# Altium PCB GateDrive.PcbDoc (part 3 of 4)
Units mm, origin at the board's own origin, x right, y up, seen from the top; angles counter-clockwise.
Board outline 204.3 x 129.8 mm, 4 copper layers (Top Layer, Internal Plane 1, Internal Plane 2, Bottom Layer), stack 0.778 mm thick; 412 components, 227 nets, 1153 pads, 570 vias.
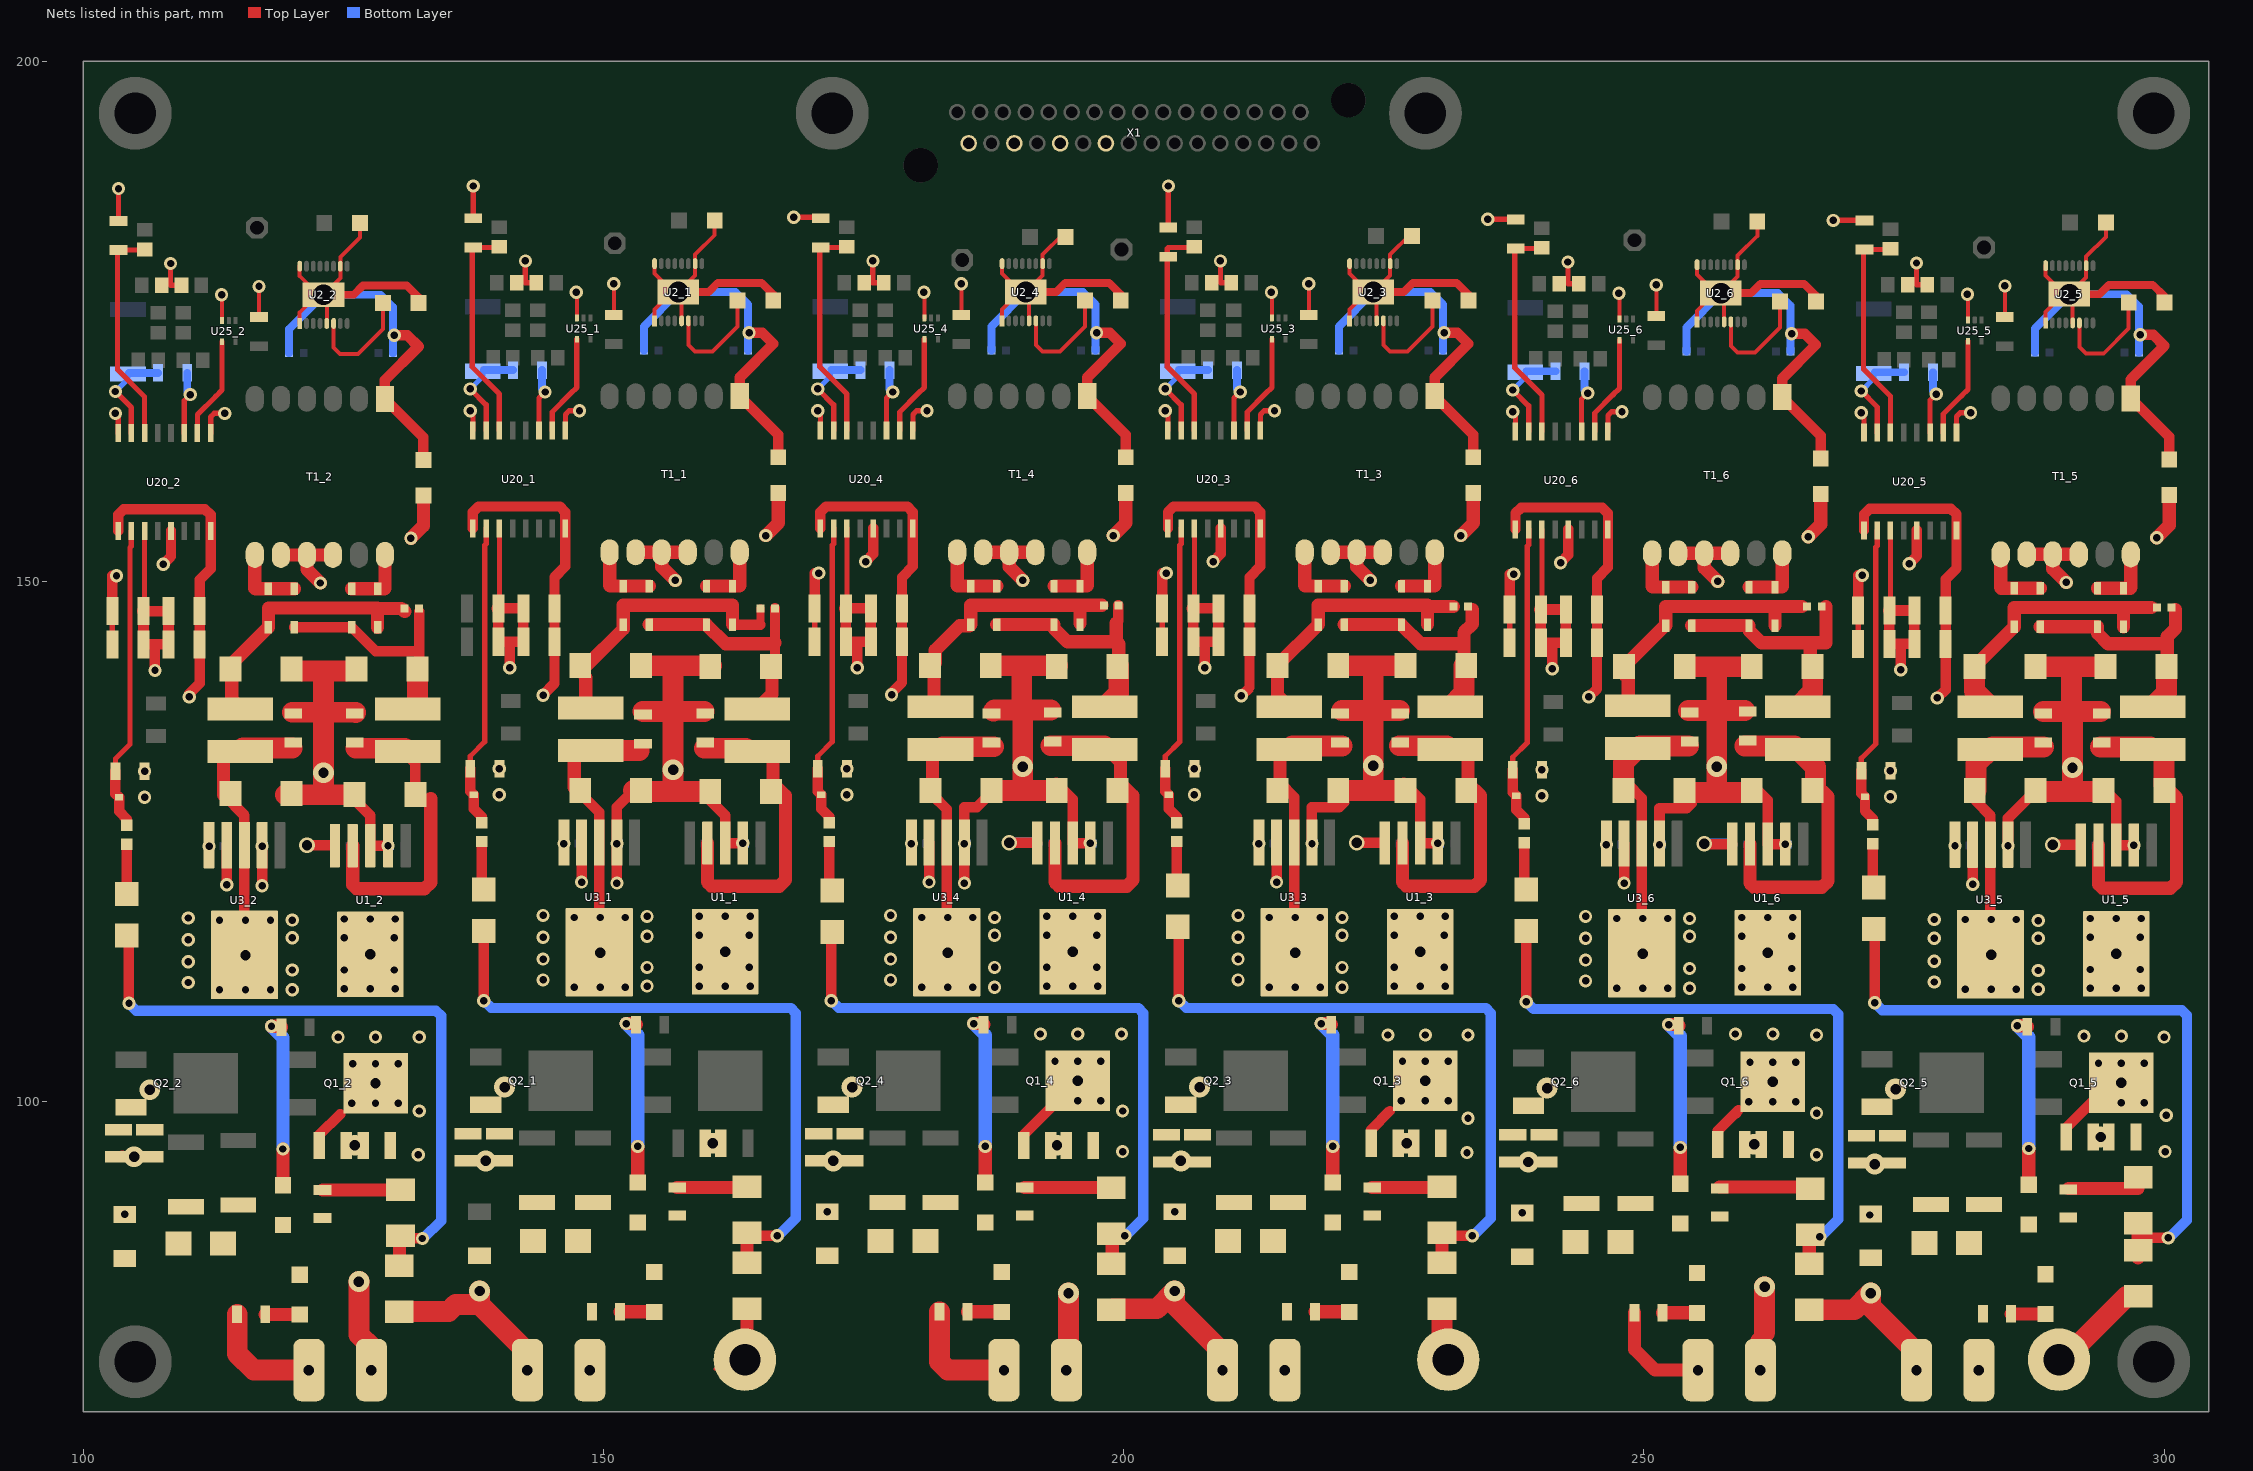
[diagram p4: the nets of this part, all layers, seen from the top]

## Via types
v1: diameter 1.27, hole 0.711, Top Layer to Bottom Layer, 510 vias
v2: diameter 2, hole 1, Top Layer to Bottom Layer, 54 vias
v3: diameter 1.5, hole 1, Top Layer to Bottom Layer, 6 vias

## Nets (pads, with @x,y where several pads share a name; then routed paths per layer and width w, separated by ;. In a path a pad name is that pad's centre, name@x,y a point inside that pad or via, vN(x,y) a via of type N, cw(c..) or ccw(c..) an arc to the next point about the centre after c; other vN are vias at no path point) (continued)
+15VT2: C3a_2.2 C3b_2.2 C68_2.2 C69_2.2 D26_2.2 Q1_2.4 R1_2.2 U1_2.5 U20_2.5 | length 20
  Top Layer w0.508: C68_2.2@102.8,143.95 C69_2.2@102.8,147.15 ; v1@102.8,150.55 v1(103.2,150.55)
  Top Layer w1: C69_2.2@102.8,147.15 v1@102.8,150.55 ; v1(107.7,151.65) 108.44,152.39 U20_2.5@108.44,154.852 ; v3(121.51,124.64) 124.16,124.64 U1_2.5@124.2,124.6 ; C3b_2.2@122.7,95.8 122.7,96.8 124.7,98.8
  Bottom Layer w0.508: v3@121.51,124.46 v3(121.51,124.64) 121.6,124.55 R1_2.2@124.203,124.55
  other v1: 104,89.16 132.2,94.9 132.3,99.1 125.8,99.85 128.1,99.85 130.3,99.85 125.9,103.65 128.1,103.65 130.3,103.65 124.5,106.2 128.1,106.2 132.3,106.2
  other v2: 128.1,101.75
+15VT3: C3a_3.2 C3b_3.2 C68_3.2 C69_3.2 D26_3.2 Q1_3.4 R1_3.2 U1_3.5 U20_3.5 | length 20
  Top Layer w0.508: C68_3.2@203.7,144.2 C69_3.2@203.7,147.4 ; v1@203.7,150.8 v1(204.1,150.8) ; U1_3.5@225.06,124.89 U1_3.5@225.1,124.85
  Top Layer w1: C69_3.2@203.7,147.4 v1@203.7,150.8 ; v1(208.6,151.9) 209.34,152.64 U20_3.5@209.34,155.102 ; v3(222.41,124.89) U1_3.5@225.06,124.89 ; C3b_3.2@223.8,96 223.8,97.3 225.6,99.1
  Bottom Layer w0.508: v3@222.41,124.71 v3(222.41,124.89) 222.5,124.8 R1_3.2@225.103,124.8
  other v1: 204.9,89.41 233,95.1 233.1,98.4 226.7,100.1 229,100.1 231.2,100.1 226.8,103.9 229,103.9 231.2,103.9 225.4,106.4 229,106.4 233.1,106.4
  other v2: 229,102
+15VT4: C3a_4.2 C3b_4.2 C68_4.2 C69_4.2 D26_4.2 Q1_4.4 R1_4.2 U1_4.5 U20_4.5 | length 24.5
  Top Layer w0.508: C68_4.2@170.3,144.2 C69_4.2@170.3,147.4 ; v1@170.3,150.8 v1(170.7,150.8)
  Top Layer w1: C69_4.2@170.3,147.4 v1@170.3,150.8 ; v1(175.2,151.9) 175.94,152.64 U20_4.5@175.94,155.102 ; v3(189.01,124.89) 191.66,124.89 U1_4.5@191.7,124.85 ; C3b_4.2@190.4,95.8 190.4,96.8 v2(195.6,102)
  Bottom Layer w0.508: v3@189.01,124.71 v3(189.01,124.89)
  Bottom Layer w1: v3(189.01,124.89) 191.613,124.89 R1_4.2@191.703,124.8
  other v1: 171.5,89.41 199.9,95.2 199.9,99.1 195.6,100.1 197.8,100.1 193.4,103.9 195.6,103.9 197.8,103.9 192,106.5 195.6,106.5 199.8,106.5
+15VT5: C3a_5.2 C3b_5.2 C68_5.2 C69_5.2 D26_5.2 Q1_5.4 R1_5.2 U1_5.5 U20_5.5 | length 24.3
  Top Layer w0.508: C68_5.2@270.6,144 C69_5.2@270.6,147.2 ; v1@270.6,150.6 v1(271,150.6) ; C3b_5.2@290.6,96.6 C3b_5.2@290.6,97.5 ; U1_5.5@291.96,124.69 U1_5.5@292,124.65 ; Q1_5.4@294.9,101.8 v2(295.9,101.8)
  Top Layer w1: C69_5.2@270.6,147.2 v1@270.6,150.6 ; v1(271.7,89.1) 271.7,89.11 D26_5.2@271.8,89.21 ; v1(275.5,151.7) 276.24,152.44 U20_5.5@276.24,154.902 ; v3(289.31,124.69) U1_5.5@291.96,124.69 ; C3b_5.2@290.6,97.5 Q1_5.4@294.9,101.8
  Bottom Layer w0.508: v3@289.31,124.51 v3(289.31,124.69) 289.4,124.6 R1_5.2@292.003,124.6
  other v1: 300.1,95.2 300.2,98.7 295.9,99.9 298.1,99.9 293.7,103.7 295.9,103.7 298.1,103.7 300,106.2 292.3,106.3 295.9,106.3
+15VT6: C3a_6.2 C3b_6.2 C68_6.2 C69_6.2 D26_6.2 Q1_6.4 R1_6.2 U1_6.5 U20_6.5 | length 20.3
  Top Layer w0.508: C68_6.2@237.1,144.1 C69_6.2@237.1,147.3 ; v1@237.1,150.7 v1(237.5,150.7)
  Top Layer w1: C69_6.2@237.1,147.3 v1@237.1,150.7 ; v1(242,151.8) 242.74,152.54 U20_6.5@242.74,155.002 ; v3@255.85,124.75 U1_6.5@258.5,124.75 ; C3b_6.2@257.1,95.9 257.1,97.2 258.8,98.9 258.9,98.9 258.9,99 259.1,99.2
  Top Layer w1.27: v3(255.81,124.79) v3@255.85,124.75
  Bottom Layer w0.508: v3@255.81,124.61 v3(255.81,124.79)
  Bottom Layer w1: v3(255.81,124.79) 258.413,124.79 R1_6.2@258.503,124.7
  other v1: 238.3,89.31 266.6,94.9 266.6,98.9 260.1,100 262.4,100 264.6,100 260.2,103.8 262.4,103.8 264.6,103.8 266.6,106.4 258.8,106.5 262.4,106.5
  other v2: 262.4,101.9
-8.5VT1: C11a_1.1 C11b_1.1 C70_1.1 C71_1.1 Q2_1.3 R6_1.2 U3_1.5 U20_1.1 U20_1.8 | length 29.5
  Top Layer w1: U20_1.1@137.46,155.102 137.46,156.66 138,157.2 145.8,157.2 146.35,156.65 U20_1.8@146.35,155.102 146.35,151.45 145.3,150.4 C71_1.1@145.3,147.4 C70_1.1@145.3,144.2 145.3,140.2 144.2,139.1 v1(144.2,139.05) ; Q2_1.3@138.6,99.61 Q2_1.3@138.7,99.71
  other v1: 146.203,124.8
  other v2: 140.5,101.4
-8.5VT2: C11a_2.1 C11b_2.1 C70_2.1 C71_2.1 Q2_2.3 R6_2.2 U3_2.5 U20_2.1 U20_2.8 | length 29.4
  Top Layer w1: U20_2.1@103.36,154.852 103.36,156.41 103.9,156.95 111.7,156.95 112.25,156.4 U20_2.8@112.25,154.852 112.25,151.2 111.2,150.15 C71_2.1@111.2,147.15 C70_2.1@111.2,143.95 111.2,140.2 110.2,139.2 v1(110.2,138.9) ; Q2_2.3@104.5,99.36 Q2_2.3@104.6,99.46
  other v1: 112.103,124.55
  other v2: 106.4,101.15
-8.5VT3: C11a_3.1 C11b_3.1 C70_3.1 C71_3.1 Q2_3.3 R6_3.2 U3_3.5 U20_3.1 U20_3.8 | length 29.5
  Top Layer w1: U20_3.1@204.26,155.102 204.26,156.66 204.8,157.2 212.6,157.2 213.15,156.65 U20_3.8@213.15,155.102 213.15,151.45 212.1,150.4 C71_3.1@212.1,147.4 C70_3.1@212.1,144.2 212.1,139.8 v1(211.3,139) ; Q2_3.3@205.4,99.61 Q2_3.3@205.5,99.71
  other v1: 213.003,124.8
  other v2: 207.3,101.4
-8.5VT4: C11a_4.1 C11b_4.1 C70_4.1 C71_4.1 Q2_4.3 R6_4.2 U3_4.5 U20_4.1 U20_4.8 | length 29.4
  Top Layer w1: U20_4.1@170.86,155.102 170.86,156.66 171.4,157.2 179.2,157.2 179.75,156.65 U20_4.8@179.75,155.102 179.75,151.45 178.7,150.4 C71_4.1@178.7,147.4 C70_4.1@178.7,144.2 178.7,140.3 177.7,139.3 v1(177.7,139.1) ; Q2_4.3@172,99.61 Q2_4.3@172.1,99.71
  other v1: 179.603,124.8
  other v2: 173.9,101.4
-8.5VT5: C11a_5.1 C11b_5.1 C70_5.1 C71_5.1 Q2_5.3 R6_5.2 U3_5.5 U20_5.1 U20_5.8 | length 29.5
  Top Layer w1: U20_5.1@271.16,154.902 271.16,156.46 271.7,157 279.5,157 280.05,156.45 U20_5.8@280.05,154.902 280.05,151.25 279,150.2 C71_5.1@279,147.2 C70_5.1@279,144 279,139.6 v1(278.2,138.8) ; Q2_5.3@272.3,99.41 Q2_5.3@272.4,99.51
  other v1: 279.903,124.6
  other v2: 274.2,101.2
-8.5VT6: C11a_6.1 C11b_6.1 C70_6.1 C71_6.1 Q2_6.3 R6_6.2 U3_6.5 U20_6.1 U20_6.8 | length 29.5
  Top Layer w1: U20_6.1@237.66,155.002 237.66,156.56 238.2,157.1 246,157.1 246.55,156.55 U20_6.8@246.55,155.002 246.55,151.35 245.5,150.3 C71_6.1@245.5,147.3 C70_6.1@245.5,144.1 245.5,139.7 v1(244.7,138.9) ; Q2_6.3@238.8,99.51 Q2_6.3@238.9,99.61
  other v1: 246.403,124.7
  other v2: 240.7,101.3
COMMON1: C1_1.1 C2_1.2 C3a_1.1 C3b_1.1 C4_1.2 C7_1.2 C8_1.1 C9_1.1 C10_1.1 C11a_1.2 C11b_1.2 C68_1.1 C69_1.1 C70_1.2 C71_1.2 C(Desat)1_1.1 D25_1.2 D32_2.1 R2_1.1 R7_1.1 T1_1.8 T1_1.9 T1_1.10 T1E_T2C.1 U1_1.2 U1_1.3 U1_1.6 U3_1.2 U3_1.4 U20_1.3 | length 103.8
  Top Layer w0.5: C69_1.1@140,147.5 U20_1.3@140,155.102
  Top Layer w1.016: v2@138.6,94.3 v2(138.7,94.3) ; v1(141,141.7) 141,144.2 ; v1(147.9,121.1) U3_1.4@147.9,124.9 ; v1(151.3,121) v1(151.3,124.8) U3_1.2@151.3,124.9 151.3,128.3 C10_1.1@152.9,129.9 ; C2_1.2@160.133,129.067 161.7,127.5 U1_1.3@161.7,124.85 v1(163.4,124.85) ; 141,144.2 C70_1.2@142.3,144.2 C71_1.2@142.3,147.4 C69_1.1@139.9,147.4 C68_1.1@139.9,144.2 141,144.2
  Top Layer w1.27: C69_1.1@139.9,147.4 C69_1.1@140,147.5 ; T1_1.8@153.1,152.8 T1_1.9@155.6,152.8 ; C9_1.1@154.125,141.8 C9_1.1@154.225,141.9 ; 156.7,133.5 156.7,133.7 ; v1(156.9,150.1) 155.6,151.4 T1_1.9@155.6,152.8 ; T1_1.10@158.1,152.8 T1_1.9@155.6,152.8 ; v1(165.6,154.4) 166.8,155.6 C7_1.2@166.8,158.5
  Top Layer w2: D32_2.1@130.4,79.84 135.14,79.84 135.8,80.5 138.1,80.5 ; v2(138.1,81.8) 138.1,80.5 ; T1E_T2C.1@142.6,74.3 T1E_T2C.1@142.7,74.2 142.7,75.9 138.1,80.5 ; C10_1.1@152.9,129.9 153,129.8 156.5,129.8 ; C8_1.1@153.8,137.529 153.829,137.5 156.7,137.5 ; C9_1.1@154.225,141.9 156.9,141.9 ; 156.7,133.5 v2(156.7,131.9) 156.7,130 156.5,129.8 ; 156.7,133.7 156.7,137.5 ; C1_1.1@159.7,137.5 156.7,137.5 ; C2_1.2@160.275,129.8 156.5,129.8 ; C4_1.2@160.4,141.9 156.9,141.9 ; 156.7,137.5 156.7,141.7 156.9,141.9
  other v1: 159.2,111.1 161.7,111.1 164.1,111.1 159.2,112.9 164,112.9 159.2,116 164,116 159.2,117.8 161.7,117.8 164.1,117.8 140,129.5 140,132
  other v2: 160.5,96 161.7,114.4
COMMON2: C1_2.1 C2_2.2 C3a_2.1 C3b_2.1 C4_2.2 C7_2.2 C8_2.1 C9_2.1 C10_2.1 C11a_2.2 C11b_2.2 C68_2.1 C69_2.1 C70_2.2 C71_2.2 C(Desat)1_2.1 D25_2.2 R2_2.1 R7_2.1 T1_2.8 T1_2.9 T1_2.10 T2E.1 U1_2.2 U1_2.3 U1_2.6 U3_2.2 U3_2.4 U20_2.3 | length 88.3
  Top Layer w0.5: C69_2.1@105.9,147.25 U20_2.3@105.9,154.852
  Top Layer w1.016: C11a_2.2@103.75,94.8 103.85,94.7 v2(104.9,94.7) ; v1(106.9,141.45) 106.9,143.95 ; v1(113.8,120.85) U3_2.4@113.8,124.65 ; v1(117.2,120.75) v1(117.2,124.55) U3_2.2@117.2,124.65 ; C10_2.1@119.325,129.6 C10_2.1@119.425,129.5 ; C2_2.2@126.075,129.5 126.075,129.025 127.6,127.5 U1_2.3@127.6,124.6 v1(129.3,124.6) ; 106.9,143.95 C70_2.2@108.2,143.95 C71_2.2@108.2,147.15 C69_2.1@105.8,147.15 C68_2.1@105.8,143.95 106.9,143.95
  Top Layer w1.27: C69_2.1@105.8,147.15 C69_2.1@105.9,147.25 ; T1_2.8@119,152.55 T1_2.9@121.5,152.55 ; v1(122.8,149.85) 121.5,151.15 T1_2.9@121.5,152.55 ; 123.1,133.95 123.1,134.05 ; T1_2.10@124,152.55 T1_2.9@121.5,152.55 ; 125.204,141.404 125.209,141.4 ; T2E.1@127.7,74.2 T2E.1@127.7,76.4 ; v1(131.5,154.15) 132.7,155.35 C7_2.2@132.7,158.25
  Top Layer w2: C10_2.1@119.425,129.5 123.2,129.5 ; C8_2.1@120.1,137.429 123.1,137.429 ; 121.15,141.4 123.1,141.4 ; 123.1,133.95 v2(123.1,131.6) 123.1,129.6 123.2,129.5 ; 123.1,134.05 123.1,137.429 ; 125.209,141.4 123.1,141.4 ; C2_2.2@126.075,129.5 123.2,129.5 ; C1_2.1@126.2,137.4 126.171,137.429 123.1,137.429 ; v2(126.5,82.7) 126.5,77.6 T2E.1@127.7,76.4 ; 123.1,137.429 123.1,141.4
  other v1: 125.1,110.85 127.6,110.85 130,110.85 125.1,112.65 129.9,112.65 125.1,115.75 129.9,115.75 125.1,117.55 127.6,117.55 130,117.55 105.9,129.25 105.9,131.75
  other v2: 126.1,95.8 127.6,114.15
COMMON3: C1_3.1 C2_3.2 C3a_3.1 C3b_3.1 C4_3.2 C7_3.2 C8_3.1 C9_3.1 C10_3.1 C11a_3.2 C11b_3.2 C68_3.1 C69_3.1 C70_3.2 C71_3.2 C(Desat)1_3.1 D25_3.2 D32_4.1 R2_3.1 R7_3.1 T1_3.8 T1_3.9 T1_3.10 T3E_T4C.1 U1_3.2 U1_3.3 U1_3.6 U3_3.2 U3_3.4 U20_3.3 | length 97.4
  Top Layer w0.5: C69_3.1@206.8,147.5 U20_3.3@206.8,155.102
  Top Layer w1.016: C11a_3.2@205.4,94.3 v2(205.5,94.3) ; v1(207.8,141.7) 207.8,144.2 ; v1(214.7,121.1) U3_3.4@214.7,124.9 ; v1(218.1,124.8) U3_3.2@218.1,124.9 218.1,128.3 220.7,128.3 C10_3.1@221.188,128.788 ; C2_3.2@226.933,130.625 228.5,129.059 U1_3.3@228.5,124.85 v1(230.2,124.85) ; 207.8,144.2 C70_3.2@209.1,144.2 C71_3.2@209.1,147.4 C69_3.1@206.7,147.4 C68_3.1@206.7,144.2 207.8,144.2
  Top Layer w1.27: C69_3.1@206.7,147.4 C69_3.1@206.8,147.5 ; T1_3.8@219.9,152.8 T1_3.9@222.4,152.8 ; v1(223.7,150.1) 222.4,151.4 T1_3.9@222.4,152.8 ; T1_3.10@224.9,152.8 T1_3.9@222.4,152.8 ; v1(232.4,154.4) 233.6,155.6 C7_3.2@233.6,158.5
  Top Layer w2: D32_4.1@199,80.09 203.19,80.09 v2(204.9,81.8) 204.9,80.5 T3E_T4C.1@209.5,75.9 ; C10_3.1@220.625,129.9 224,129.9 ; C9_3.1@220.925,141.9 224,141.9 ; C8_3.1@221,137.6 224,137.6 ; C1_3.1@226.5,137.6 224,137.6 ; C4_3.2@226.875,141.9 224,141.9 ; C2_3.2@227.075,129.9 224,129.9 ; 224,129.9 v2(224,132.3) 224,137.6 ; 224,137.6 224,141.9
  other v1: 226,111.1 228.5,111.1 230.9,111.1 226,112.9 230.8,112.9 226,116 230.8,116 226,117.8 228.5,117.8 230.9,117.8 206.8,129.5 206.8,132
  other v2: 227.2,96 228.5,114.4
COMMON4: C1_4.1 C2_4.2 C3a_4.1 C3b_4.1 C4_.2 C7_4.2 C8_4.1 C9_4.1 C10_4.1 C11a_4.2 C11b_4.2 C68_4.1 C69_4.1 C70_4.2 C71_4.2 C(Desat)1_4.1 D25_4.2 R2_4.1 R7_4.1 T1_4.8 T1_4.9 T1_4.10 T4E.1 U1_4.2 U1_4.3 U1_4.6 U3_4.2 U3_4.4 U20_4.3 | length 94.2
  Top Layer w0.5: C69_4.1@173.4,147.5 U20_4.3@173.4,155.102
  Top Layer w1.016: v2@172,94.3 v2(172.1,94.3) ; v1(174.4,141.7) 174.4,144.2 ; v1(181.3,121.1) U3_4.4@181.3,124.9 ; v1(184.7,121) v1(184.7,124.8) U3_4.2@184.7,124.9 184.7,128.3 185.9,128.3 C10_4.1@187.4,129.8 ; C2_4.2@193.533,130.625 195.1,129.059 U1_4.3@195.1,124.85 v1(196.8,124.85) ; 174.4,144.2 C70_4.2@175.7,144.2 C71_4.2@175.7,147.4 C69_4.1@173.3,147.4 C68_4.1@173.3,144.2 174.4,144.2
  Top Layer w1.27: C69_4.1@173.3,147.4 C69_4.1@173.4,147.5 ; T1_4.8@186.5,152.8 T1_4.9@189,152.8 ; v1(190.3,150.1) 189,151.4 T1_4.9@189,152.8 ; T1_4.10@191.5,152.8 T1_4.9@189,152.8 ; T4E.1@194.5,74.2 194.5,76.9 T4E.1@194.7,77.1 ; v1(199,154.4) 200.2,155.6 C7_4.2@200.2,158.5
  Top Layer w2: C10_4.1@187.4,129.8 187.5,129.9 190.2,129.9 ; C8_4.1@187.5,137.529 187.6,137.629 190.2,137.629 ; C9_4.1@187.625,141.9 190.2,141.9 ; C1_4.1@193,137.629 190.2,137.629 ; C2_4.2@193.575,129.7 193.375,129.9 190.5,129.9 190.2,130.2 190.3,130.3 v2(190.3,132.2) 190.3,137.529 190.2,137.629 ; C4_.2@193.675,141.9 190.2,141.9 ; T4E.1@194.7,77.1 v2(194.7,81.6) ; 190.2,137.629 190.2,141.9
  other v1: 192.6,111.1 195.1,111.1 197.5,111.1 192.6,112.9 197.4,112.9 192.6,116 197.4,116 192.6,117.8 195.1,117.8 197.5,117.8 173.4,129.5 173.4,132
  other v2: 193.6,95.8 195.1,114.4
COMMON5: C1_5.1 C2_5.2 C3a_5.1 C3b_5.1 C4_5.2 C7_5.2 C8_5.1 C9_5.1 C10_5.1 C11a_5.2 C11b_5.2 C68_5.1 C69_5.1 C70_5.2 C71_5.2 C(Desat)1_5.1 D25_5.2 D32_6.1 R2_5.1 R7_5.1 T1_5.8 T1_5.9 T1_5.10 T5E_T6C.1 U1_5.2 U1_5.3 U1_5.6 U3_5.2 U3_5.4 U20_5.3 | length 97.2
  Top Layer w0.5: C69_5.1@273.7,147.3 U20_5.3@273.7,154.902
  Top Layer w1.016: v2(272.2,94) v2@272.3,94.1 ; v1(274.7,141.5) 274.7,144 ; v1(281.6,120.9) U3_5.4@281.6,124.7 ; v1(285,124.6) U3_5.2@285,124.7 285,127.25 C10_5.1@287.65,129.9 ; C10_5.1@288,130.322 C10_5.1@288.088,130.41 ; C2_5.2@293.833,130.425 295.4,128.859 U1_5.3@295.4,124.65 v1(297.1,124.65) ; 274.7,144 C70_5.2@276,144 C71_5.2@276,147.2 C69_5.1@273.6,147.2 C68_5.1@273.6,144 274.7,144
  Top Layer w1.27: C69_5.1@273.6,147.2 C69_5.1@273.7,147.3 ; T1_5.8@286.8,152.6 T1_5.9@289.3,152.6 ; v1(290.6,149.9) 289.3,151.2 T1_5.9@289.3,152.6 ; T1_5.10@291.8,152.6 T1_5.9@289.3,152.6 ; v1(299.3,154.2) 300.5,155.4 C7_5.2@300.5,158.3
  Top Layer w2: D32_6.1@265.9,79.99 270.19,79.99 v2(271.8,81.6) 271.8,80.3 T5E_T6C.1@276.4,75.7 ; C9_5.1@287.625,141.8 291.1,141.8 ; C10_5.1@287.65,129.9 287.75,129.8 291.1,129.8 ; C8_5.1@288.4,137.5 291.1,137.5 ; C2_5.2@293.208,129.8 291.1,129.8 ; C1_5.1@293.9,137.5 291.1,137.5 ; C4_5.2@294.375,141.8 291.1,141.8 ; 291.1,129.8 291.2,129.9 v2(291.2,132.1) 291.2,137.4 291.1,137.5 ; 291.1,137.5 291.1,141.8
  other v1: 292.9,110.9 295.4,110.9 297.8,110.9 292.9,112.7 297.7,112.7 292.9,115.8 297.7,115.8 292.9,117.6 295.4,117.6 297.8,117.6 273.7,129.3 273.7,131.8
  other v2: 293.9,96.6 295.4,114.2
COMMON6: C1_6.1 C2_6.2 C3a_6.1 C3b_6.1 C4_6.2 C7_6.2 C8_6.1 C9_6.1 C10_6.1 C11a_6.2 C11b_6.2 C68_6.1 C69_6.1 C70_6.2 C71_6.2 C(Desat)1_6.1 D25_6.2 R2_6.1 R7_6.1 T1_6.8 T1_6.9 T1_6.10 T6E.1 U1_6.2 U1_6.3 U1_6.6 U3_6.2 U3_6.4 U20_6.3 | length 92.9
  Top Layer w0.5: C69_6.1@240.2,147.4 U20_6.3@240.2,155.002
  Top Layer w1.016: v2@238.8,94.2 v2(238.9,94.2) ; v1(241.2,141.6) 241.2,144.1 ; v1(248.1,121) U3_6.4@248.1,124.8 ; v1(251.5,124.7) U3_6.2@251.5,124.8 251.5,128.2 254.1,128.2 254.588,128.688 C10_6.1@254.588,129.7 ; C2_6.2@260.333,130.525 261.9,128.959 U1_6.3@261.9,124.75 v1(263.6,124.75) ; 241.2,144.1 C70_6.2@242.5,144.1 C71_6.2@242.5,147.3 C69_6.1@240.1,147.3 C68_6.1@240.1,144.1 241.2,144.1
  Top Layer w1.27: C69_6.1@240.1,147.3 C69_6.1@240.2,147.4 ; T1_6.8@253.3,152.7 T1_6.9@255.8,152.7 ; v1(257.1,150) 255.8,151.3 T1_6.9@255.8,152.7 ; T1_6.10@258.3,152.7 T1_6.9@255.8,152.7 ; T6E.1@261.2,74.2 261.2,76.8 260.9,77.1 261.6,77.8 ; v1(265.8,154.3) 267,155.5 C7_6.2@267,158.4
  Top Layer w2: C10_6.1@253.9,129.9 254.1,129.7 254.588,129.7 257,129.7 ; C9_6.1@253.925,141.8 C4_6.2@260.375,141.8 ; C8_6.1@254.3,137.6 257,137.6 ; 257,141.6 257,137.6 ; C1_6.1@259.7,137.6 257,137.6 ; C2_6.2@260.375,129.9 260.175,129.7 257,129.7 ; 261.6,77.8 v2(261.6,82.2) ; 257,129.7 v2(257,132.2) 257,137.6
  other v1: 259.4,111 261.9,111 264.3,111 259.4,112.8 264.2,112.8 259.4,115.9 264.2,115.9 259.4,117.7 261.9,117.7 264.3,117.7 240.2,129.4 240.2,131.9
  other v2: 260.6,95.9 261.9,114.3
GND: C5_1.2 C5_2.2 C5_3.2 C5_4.2 C5_5.2 C5_6.2 C6_1.2 C6_2.2 C6_3.2 C6_4.2 C6_5.2 C6_6.2 C7_1.1 C7_2.1 C7_3.1 C7_4.1 C7_5.1 C7_6.1 C67_1.1 C67_2.1 C67_3.1 C67_4.1 C67_5.1 C67_6.1 C72_1.1 C72_2.1 C72_3.1 C72_4.1 C72_5.1 C72_6.1 C73_1.2 C73_2.2 C73_3.2 C73_4.2 C73_5.2 C73_6.2 R3_1.2 R3_2.2 R3_3.2 R3_4.2 R3_5.2 R3_6.2 R4_1.2 R4_2.2 R4_3.2 R4_4.2 R4_5.2 R4_6.2 R95_1.2 R95_2.2 R95_3.2 R95_4.2 R95_5.2 R95_6.2 R96_1.2 R96_2.2 R96_3.2 R96_4.2 R96_5.2 R96_6.2 T1_1.1 T1_2.1 T1_3.1 T1_4.1 T1_5.1 T1_6.1 U2_1.0 U2_1.1 U2_1.5 U2_1.10 U2_1.16 U2_2.0 U2_2.1 U2_2.5 U2_2.10 U2_2.16 U2_3.0 U2_3.1 U2_3.5 U2_3.10 U2_3.16 U2_4.0 U2_4.1 U2_4.5 U2_4.10 U2_4.16 U2_5.0 U2_5.1 U2_5.5 U2_5.10 U2_5.16 U2_6.0 U2_6.1 U2_6.5 U2_6.10 U2_6.16 U20_1.9 U20_1.11 U20_1.16 U20_2.9 U20_2.11 U20_2.16 U20_3.9 U20_3.11 U20_3.16 U20_4.9 U20_4.11 U20_4.16 U20_5.9 U20_5.11 U20_5.16 U20_6.9 U20_6.11 U20_6.16 U25_1.3 U25_2.3 U25_3.3 U25_4.3 U25_5.3 U25_6.3 X1.2 X1.6 X1.10 X1.14 | length 518.6
  Top Layer w0.381: U25_2.3@113.35,175.075 v1@113.35,177.5 ; C73_2.2@116.9,175.35 v1(116.9,178.35) ; U2_2.1@120.814,174.794 120.814,175.864 122.5,177.55 U2_2.0@122.6,177.55 ; U2_2.16@120.814,180.294 120.814,179.336 U2_2.0@122.6,177.55 ; U2_2.5@123.414,174.794 123.414,177.236 U2_2.0@123.1,177.55 ; C5_2.2@126.6,184.45 126.6,183.05 124.714,181.164 U2_2.10@124.714,180.294 124.714,179.164 U2_2.0@123.1,177.55 ; U25_1.3@147.45,175.325 v1@147.45,177.75 ; C73_1.2@151,175.6 v1(151,178.6) ; U2_1.1@154.914,175.044 154.914,176.114 156.6,177.8 U2_1.0@156.7,177.8 ; U2_1.16@154.914,180.544 154.914,179.586 U2_1.0@156.7,177.8 ; U2_1.5@157.514,175.044 157.514,177.486 U2_1.0@157.2,177.8 ; C5_1.2@160.7,184.7 160.7,183.3 158.814,181.414 U2_1.10@158.814,180.544 158.814,179.414 U2_1.0@157.2,177.8 ; U25_4.3@180.85,175.325 v1@180.85,177.75 ; C73_4.2@184.4,175.6 v1(184.4,178.6) ; U2_4.1@188.314,175.044 188.314,176.114 190,177.8 U2_4.0@190.1,177.8 ; U2_4.16@188.314,180.544 188.314,179.586 U2_4.0@190.1,177.8 ; U2_4.5@190.914,175.044 190.914,177.486 U2_4.0@190.6,177.8 ; C5_4.2@194.5,182.9 194.1,183.3 192.214,181.414 U2_4.10@192.214,180.544 192.214,179.414 U2_4.0@190.6,177.8 ; U25_3.3@214.25,175.325 v1@214.25,177.75 ; C73_3.2@217.8,175.6 v1(217.8,178.6) ; U2_3.1@221.714,175.044 221.714,176.114 223.4,177.8 U2_3.0@223.5,177.8 ; U2_3.16@221.714,180.544 221.714,179.586 U2_3.0@223.5,177.8 ; U2_3.5@224.314,175.044 224.314,177.486 U2_3.0@224,177.8 ; C5_3.2@227.5,183.3 225.614,181.414 U2_3.10@225.614,180.544 225.614,179.414 U2_3.0@224,177.8 ; U25_6.3@247.65,175.225 v1@247.65,177.65 ; C73_6.2@251.2,175.5 v1(251.2,178.5) ; U2_6.1@255.114,174.944 255.114,176.014 256.8,177.7 U2_6.0@256.9,177.7 ; U2_6.16@255.114,180.444 255.114,179.486 U2_6.0@256.9,177.7 ; U2_6.5@257.714,174.944 257.714,177.386 U2_6.0@257.4,177.7 ; C5_6.2@260.9,184.6 260.9,183.2 259.014,181.314 U2_6.10@259.014,180.444 259.014,179.314 U2_6.0@257.4,177.7 ; U25_5.3@281.15,175.125 v1@281.15,177.55 ; C73_5.2@284.7,175.4 v1(284.7,178.4) ; U2_5.1@288.614,174.844 288.614,175.914 290.3,177.6 U2_5.0@290.4,177.6 ; U2_5.16@288.614,180.344 288.614,179.386 U2_5.0@290.4,177.6 ; U2_5.5@291.214,174.844 291.214,177.286 U2_5.0@290.9,177.6 ; C5_5.2@294.4,184.5 294.4,183.1 292.514,181.214 U2_5.10@292.514,180.344 292.514,179.214 U2_5.0@290.9,177.6 ; U2_2.0@122.6,177.55 U2_2.0@123.1,177.55 ; U2_1.0@156.7,177.8 U2_1.0@157.2,177.8 ; U2_4.0@190.1,177.8 U2_4.0@190.6,177.8 ; U2_3.0@223.5,177.8 U2_3.0@224,177.8 ; U2_6.0@256.9,177.7 U2_6.0@257.4,177.7 ; U2_5.0@290.4,177.6 U2_5.0@290.9,177.6
  Top Layer w0.508: v1(103.1,166.15) 103.36,165.89 U20_2.16@103.36,164.25 ; C72_2.1@103.4,184.65 v1(103.4,187.75) ; v1(108.4,180.55) 108.4,178.45 R95_2.2@109.45,178.45 ; U20_2.11@109.71,164.25 109.71,167.36 v1(110.3,167.95) ; U20_2.9@112.25,164.25 112.25,165.8 112.6,166.15 v1(113.6,166.15) ; v1(113.3,177.55) v1@113.35,177.5 ; v1(137.2,166.4) 137.46,166.14 U20_1.16@137.46,164.5 ; C72_1.1@137.5,184.9 v1(137.5,188) ; v1(142.5,180.8) 142.5,178.7 R95_1.2@143.55,178.7 ; U20_1.11@143.81,164.5 143.81,167.61 v1(144.4,168.2) ; U20_1.9@146.35,164.5 146.35,166.05 146.7,166.4 v1(147.7,166.4) ; v1(147.4,177.8) v1@147.45,177.75 ; v1(168.3,185) 170.8,185 C72_4.1@170.9,184.9 ; v1(170.6,166.4) 170.86,166.14 U20_4.16@170.86,164.5 ; v1(175.9,180.8) 175.9,178.7 R95_4.2@176.95,178.7 ; U20_4.11@177.21,164.5 177.21,167.61 v1(177.8,168.2) ; U20_4.9@179.75,164.5 179.75,166.05 180.1,166.4 v1(181.1,166.4) ; v1(180.8,177.8) v1@180.85,177.75 ; v1(204,166.4) 204.26,166.14 U20_3.16@204.26,164.5 ; C72_3.1@204.3,184 v1(204.3,188) ; v1(209.3,180.8) 209.3,178.7 R95_3.2@210.35,178.7 ; U20_3.11@210.61,164.5 210.61,167.61 v1(211.2,168.2) ; U20_3.9@213.15,164.5 213.15,166.05 213.5,166.4 v1(214.5,166.4) ; v1(214.2,177.8) v1@214.25,177.75 ; v1(235,184.8) C72_6.1@237.7,184.8 ; v1(237.4,166.3) 237.66,166.04 U20_6.16@237.66,164.4 ; v1(242.7,180.7) 242.7,178.6 R95_6.2@243.75,178.6 ; U20_6.11@244.01,164.4 244.01,167.51 v1(244.6,168.1) ; U20_6.9@246.55,164.4 246.55,165.95 246.9,166.3 v1(247.9,166.3) ; v1(247.6,177.7) v1@247.65,177.65 ; v1(268.2,184.7) C72_5.1@271.2,184.7 ; v1(270.9,166.2) 271.16,165.94 U20_5.16@271.16,164.3 ; v1(276.2,180.6) 276.2,178.5 R95_5.2@277.25,178.5 ; U20_5.11@277.51,164.3 277.51,167.41 v1(278.1,168) ; U20_5.9@280.05,164.3 280.05,165.85 280.4,166.2 v1(281.4,166.2) ; v1(281.1,177.6) v1@281.15,177.55
  Top Layer w0.762: U2_2.0@123.1,177.55 126,177.55 126.9,178.45 131.1,178.45 C6_2.2@132.229,177.321 ; U2_1.0@157.2,177.8 160.1,177.8 161,178.7 165.2,178.7 C6_1.2@166.329,177.571 ; U2_4.0@190.6,177.8 193.5,177.8 194.4,178.7 198.6,178.7 C6_4.2@199.729,177.571 ; U2_3.0@224,177.8 226.9,177.8 227.8,178.7 232,178.7 C6_3.2@233.129,177.571 ; U2_6.0@257.4,177.7 260.3,177.7 261.2,178.6 265.4,178.6 C6_6.2@266.529,177.471 ; U2_5.0@290.9,177.6 293.8,177.6 294.7,178.5 298.9,178.5 C6_5.2@300.029,177.371
  Top Layer w1.016: v1(129.9,173.65) 131.158,173.65 132.229,172.579 129,169.35 T1_2.1@129,167.55 132.7,163.85 C7_2.1@132.7,161.679 ; v1(164,173.9) 165.258,173.9 166.329,172.829 163.1,169.6 T1_1.1@163.1,167.8 166.8,164.1 C7_1.1@166.8,161.929 ; v1(197.4,173.9) 198.658,173.9 199.729,172.829 196.5,169.6 T1_4.1@196.5,167.8 200.2,164.1 C7_4.1@200.2,161.929 ; v1(230.8,173.9) 232.058,173.9 233.129,172.829 229.9,169.6 T1_3.1@229.9,167.8 233.6,164.1 C7_3.1@233.6,161.929 ; v1(264.2,173.8) 265.458,173.8 266.529,172.729 263.3,169.5 T1_6.1@263.3,167.7 267,164 C7_6.1@267,161.829 ; v1(297.7,173.7) 298.958,173.7 300.029,172.629 296.8,169.4 T1_5.1@296.8,167.6 300.5,163.9 C7_5.1@300.5,161.729
  Bottom Layer w0.508: v1@110,168.25 v1(110.3,167.95) ; v1@144.1,168.5 v1(144.4,168.2) ; v1@177.5,168.5 v1(177.8,168.2) ; v1@210.9,168.5 v1(211.2,168.2) ; v1@244.3,168.4 v1(244.6,168.1) ; v1@277.8,168.3 v1(278.1,168)
  Bottom Layer w0.762: v1@110,168.25 C67_2.1@110,170.05 ; R3_2.2@119.803,171.95 119.803,174.253 U2_2.0@123.1,177.55 128.6,177.55 129.797,176.353 R4_2.2@129.797,171.95 ; v1@144.1,168.5 C67_1.1@144.1,170.3 ; R3_1.2@153.903,172.2 153.903,174.503 U2_1.0@157.2,177.8 162.7,177.8 163.897,176.603 R4_1.2@163.897,172.2 ; v1@177.5,168.5 C67_4.1@177.5,170.3 ; R3_4.2@187.303,172.2 187.303,174.503 U2_4.0@190.6,177.8 196.1,177.8 197.297,176.603 R4_4.2@197.297,172.2 ; v1@210.9,168.5 C67_3.1@210.9,170.3 ; R3_3.2@220.703,172.2 220.703,174.503 U2_3.0@224,177.8 229.5,177.8 230.697,176.603 R4_3.2@230.697,172.2 ; v1@244.3,168.4 C67_6.1@244.3,170.2 ; R3_6.2@254.103,172.1 254.103,174.403 U2_6.0@257.4,177.7 262.9,177.7 264.097,176.503 R4_6.2@264.097,172.1 ; v1@277.8,168.3 C67_5.1@277.8,170.1 ; R3_5.2@287.603,172 287.603,174.303 U2_5.0@290.9,177.6 296.4,177.6 297.597,176.403 R4_5.2@297.597,172
IGBT1_C: D31_1.1 D32_1.2 D125.1 | length 65.3
  Top Layer w0.508: D31_1.1@163.8,87.39 D31_1.1@164.09,87.1
  Top Layer w1: v1(138.5,109.7) D125.1@138.5,116.406 ; D31_1.1@164.09,87.1 v1(166.7,87.1)
  Top Layer w1.27: D32_1.2@163.8,84.51 D31_1.1@163.8,87.39
  Bottom Layer w0.508: v1(166.7,87.1) v1@166.8,87.1
  Bottom Layer w1: v1(138.5,109.7) 139.2,109 168,109 168.5,108.5 168.5,88.8 v1@166.8,87.1
IGBT1_G: D26_1.1 D27_1.1 R42_1.1 RG2_1.2 T1B.1 | length 1.4
  Top Layer w1.27: T1B.1@147.9,75 T1B.1@148.9,76
IGBT2_G: D26_2.1 D27_2.1 R42_2.1 RG2_2.2 T2B.1 | length 11.3
  Top Layer w2: R42_2.1@114.8,79.55 114.8,75.8 116.4,74.2 T2B.1@121.7,74.2
IGBT3_G: D26_3.1 D27_3.1 R42_3.1 RG2_3.2 T3B.1
IGBT4_G: D26_4.1 D27_4.1 R42_4.1 RG2_4.2 T4B.1 | length 11.3
  Top Layer w2: R42_4.1@182.3,79.8 182.3,75 183.1,74.2 T4B.1@188.5,74.2
IGBT5_G: D26_5.1 D27_5.1 R42_5.1 RG2_5.2 T5B.1
IGBT6_G: D26_6.1 D27_6.1 R42_6.1 RG2_6.2 T6B.1 | length 11.1
  Top Layer w1.27: R42_6.1@249.1,79.7 249.1,76.2 251.1,74.2 T6B.1@255.2,74.2 T6B.1@255.2,74.9
IGBT_UPHASE_B: U20_2.10 U25_2.4 | length 9.8
  Top Layer w0.508: U20_2.10@110.98,164.25 110.98,166.03 112.75,167.8 113.35,168.4 U25_2.4@113.35,173.025
IGBT_UPHASE_T: U20_1.10 U25_1.4 | length 9.8
  Top Layer w0.508: U20_1.10@145.08,164.5 145.08,166.28 146.85,168.05 147.45,168.65 U25_1.4@147.45,173.275
IGBT_VPHASE_B: U20_4.10 U25_4.4 | length 9.8
  Top Layer w0.508: U20_4.10@178.48,164.5 178.48,166.28 180.25,168.05 180.85,168.65 U25_4.4@180.85,173.275
IGBT_VPHASE_T: U20_3.10 U25_3.4 | length 9.8
  Top Layer w0.508: U20_3.10@211.88,164.5 211.88,166.28 213.65,168.05 214.25,168.65 U25_3.4@214.25,173.275
IGBT_WPHASE_B: U20_6.10 U25_6.4 | length 9.8
  Top Layer w0.508: U20_6.10@245.28,164.4 245.28,166.18 247.05,167.95 247.65,168.55 U25_6.4@247.65,173.175
IGBT_WPHASE_T: U20_5.10 U25_5.4 | length 9.8
  Top Layer w0.508: U20_5.10@278.78,164.3 278.78,166.08 280.55,167.85 281.15,168.45 U25_5.4@281.15,173.075
NetC1_1_2: C1_1.2 C2_1.1 L1_1.2 U1_1.4 | length 29.1
  Top Layer w1.27: U1_1.4@160,124.85 160,121.1 160.4,120.7 166.9,120.7 167.5,121.3 167.5,129.398 166.288,130.61 166.3,130.622 L1_1.2@166.3,133.8 ; L1_1.2@163.679,133.971 L1_1.2@164,133.65
  Top Layer w2: 159.7,133.971 L1_1.2@163.679,133.971
NetC1_2_2: C1_2.2 C2_2.1 L1_2.2 U1_2.4 | length 29.1
  Top Layer w1: L1_2.2@131.1,133.35 131.925,132.525 C2_2.1@131.925,129.5
  Top Layer w1.27: U1_2.4@125.9,124.6 125.9,120.85 126.3,120.45 132.8,120.45 133.4,121.05 133.4,129.148
  Top Layer w2: 126.2,133.971 130.879,133.971 L1_2.2@131.2,133.65
NetC1_3_2: C1_3.2 C2_3.1 L1_3.2 U1_3.4 | length 29.6
  Top Layer w1.27: U1_3.4@226.8,124.85 226.8,121.1 227.2,120.7 233.7,120.7 234.3,121.3 234.3,129.398 233.088,130.61 233.1,130.622 L1_3.2@233.1,133.7
  Top Layer w2: C1_3.2@226.5,134.2 231.05,134.2 L1_3.2@231.4,133.85
NetC1_4_2: C1_4.2 C2_4.1 L1_4.2 U1_4.4 | length 30.8
  Top Layer w1.27: U1_4.4@193.4,124.85 193.4,121.1 193.8,120.7 200.3,120.7 200.9,121.3 200.9,129.398 199.688,130.61 199.7,130.622 199.7,132.6 L1_4.2@198.3,134
  Top Layer w2: C1_4.2@193,134.2 198.1,134.2 L1_4.2@198.3,134
NetC1_5_2: C1_5.2 C2_5.1 L1_5.2 U1_5.4 | length 30
  Top Layer w1.27: U1_5.4@293.7,124.65 293.7,120.9 294.1,120.5 300.6,120.5 301.2,121.1 301.2,129.198 299.988,130.41 C2_5.1@300,130.422
  Top Layer w2: C1_5.2@293.9,134.071 298.679,134.071 L1_5.2@298.9,133.85 ; C2_5.1@300,130.422 L1_5.2@300,133.85
NetC1_6_2: C1_6.2 C2_6.1 L1_6.2 U1_6.4 | length 30.7
  Top Layer w1.27: U1_6.4@260.2,124.75 260.2,121 260.6,120.6 267.1,120.6 267.7,121.2 267.7,129.298 C2_6.1@266.488,130.51
  Top Layer w2: 259.7,134.171 264.479,134.171 L1_6.2@264.8,133.85 266.488,132.162 C2_6.1@266.488,130.51
NetC4_1_1: C4_1.1 D1_1.2 D3_1.2 L1_1.1 R5_1.1 | length 23.3
  Top Layer w1: C4_1.1@166.497,142.172 166.497,144.1 R5_1.1@166.497,147.4
  Top Layer w1.27: D3_1.2@154.4,145.85 D1_1.2@159.9,145.85 161.75,144 166.397,144 166.497,144.1 ; L1_1.1@164.8,137.75 166.2,139.15 166.2,141.725 C4_1.1@166.125,141.8 C4_1.1@166.497,142.172
NetC4_2_1: C4_2.1 D1_2.2 D3_2.2 L1_2.1 R5_2.1 | length 23.8
  Top Layer w1: D3_2.2@120.3,145.6 D1_2.2@125.8,145.6 128.1,143.3 132.3,143.3 ; L1_2.1@131.1,137.45 L1_2.1@132.125,138.475 ; C4_2.1@132.3,140.866 132.3,143.3 ; R5_2.1@132.3,147.1 132.3,143.3
  Top Layer w2: L1_2.1@132.125,138.475 C4_2.1@132.125,141.6
NetC4_3_1: C4_3.1 D1_3.2 D3_3.2 L1_3.1 R5_3.1 | length 22.7
  Top Layer w0.508: C4_3.1@233.1,140.822 C4_3.1@233.1,141.019
  Top Layer w1.27: D3_3.2@221.2,145.85 D1_3.2@226.7,145.85 228.55,144 232.7,144 ; C4_3.1@232.725,141.9 232.725,143.975 232.7,144 ; 233.5,147.3 233.5,145.9 232.7,145.1 232.7,144
  Top Layer w2: L1_3.1@231.4,137.95 232.725,139.275 C4_3.1@232.725,141.9
NetC4_5_1: C4_5.1 D1_5.2 D3_5.2 L1_5.1 R5_5.1 | length 23.5
  Top Layer w1.27: D3_5.2@288.1,145.65 D1_5.2@293.6,145.65 293.6,145 294.6,144 300.3,144 ; C4_5.1@300.225,141.8 300.3,141.875 300.3,144 ; 301.1,147.3 301.1,145.5 300.3,144.7 300.3,144
  Top Layer w2: L1_5.1@298.9,137.95 300.225,139.275 C4_5.1@300.225,141.8
NetC4_6_1: C4_6.1 D1_6.2 D3_6.2 L1_6.1 R5_6.1 | length 24.2
  Top Layer w1.27: D3_6.2@254.6,145.75 D1_6.2@260.1,145.75 260.1,145.3 261.3,144.1 266,144.1 ; C4_6.1@266.225,141.8 266,142.025 266,144.1 ; 267.5,147.6 267.5,144.1 266,144.1
  Top Layer w2: L1_6.1@264.8,137.95 266.225,139.375 C4_6.1@266.225,141.8
NetC4__1: C4_.1 D1_4.2 D3_4.2 L1_4.1 R5_4.1 | length 22.9
  Top Layer w1: 199.3,146 199.5,146.2 R5_4.1@199.5,147.7
  Top Layer w1.27: D3_4.2@187.8,145.85 D1_4.2@193.3,145.85 193.3,145.5 194.6,144.2 199.3,144.2 ; 199.3,146 199.3,144.2 ; C4_.1@199.525,141.9 199.525,143.975 199.3,144.2
  Top Layer w2: L1_4.1@198.2,137.95 199.525,139.275 C4_.1@199.525,141.9
NetC6_1_1: C6_1.1 U2_1.6 | length 10.8
  Top Layer w0.381: U2_1.6@158.164,175.044 158.164,172.736 158.8,172.1 160.5,172.1 162.9,174.5 C6_1.1@162.9,177
NetC6_2_1: C6_2.1 U2_2.6 | length 10.8
  Top Layer w0.381: U2_2.6@124.064,174.794 124.064,172.486 124.7,171.85 126.4,171.85 128.8,174.25 C6_2.1@128.8,176.75
NetC6_3_1: C6_3.1 U2_3.6 | length 10.8
  Top Layer w0.381: U2_3.6@224.964,175.044 224.964,172.736 225.6,172.1 227.3,172.1 229.7,174.5 C6_3.1@229.7,177
NetC6_4_1: C6_4.1 U2_4.6 | length 10.8
  Top Layer w0.381: U2_4.6@191.564,175.044 191.564,172.736 192.2,172.1 193.9,172.1 196.3,174.5 C6_4.1@196.3,177
NetC6_5_1: C6_5.1 U2_5.6 | length 10.8
  Top Layer w0.381: U2_5.6@291.864,174.844 291.864,172.536 292.5,171.9 294.2,171.9 296.6,174.3 C6_5.1@296.6,176.8
NetC6_6_1: C6_6.1 U2_6.6 | length 10.8
  Top Layer w0.381: U2_6.6@258.364,174.944 258.364,172.636 259,172 260.7,172 263.1,174.4 C6_6.1@263.1,176.9
NetC8_1_2: C8_1.2 C10_1.2 L2_1.2 U3_1.3 U3_1.6 | length 27
  Top Layer w1.016: C10_1.2@147.2,130.2 149.6,127.8 U3_1.3@149.6,124.9 U3_1.6@149.6,114.35
  Top Layer w1.27: C10_1.2@147.2,130.2 147.2,133.5 147.45,133.75 L2_1.2@148.8,133.75 ; 153.45,133.75 C8_1.2@153.8,134.1
  Top Layer w2: L2_1.2@148.8,133.75 153.45,133.75
  other v1: 147.2,111 149.7,111 152.1,111 154.2,111.1 144.2,111.7 154.2,112.9 144.2,113.7 144.2,115.8 154.2,115.9 147.2,117.7 149.7,117.7 152.1,117.7 154.2,117.8 144.2,117.9
  other v2: 149.7,114.3
NetC8_2_2: C8_2.2 C10_2.2 L2_2.2 U3_2.3 U3_2.6 | length 25.6
  Top Layer w1.016: C10_2.2@113.5,129.5 115.5,127.5 U3_2.3@115.5,124.65 U3_2.6@115.5,114.1
  Top Layer w1.27: C10_2.2@113.5,129.5 L2_2.2@113.5,133.672 ; L2_2.2@115.05,133.75 115.1,133.75 L2_2.2@115.35,134
  Top Layer w2: L2_2.2@115.35,134 120.1,134
  other v1: 113.1,110.75 115.6,110.75 118,110.75 120.1,110.75 110.1,111.45 120.1,112.65 110.1,113.45 110.1,115.55 120.1,115.75 113.1,117.45 115.6,117.45 118,117.45 120.1,117.45 110.1,117.65
  other v2: 115.6,114.05
NetC8_3_2: C8_3.2 C10_3.2 L2_3.2 U3_3.3 U3_3.6 | length 25
  Top Layer w1.016: C10_3.2@215.033,130.625 216.4,129.259 U3_3.3@216.4,124.9 U3_3.6@216.4,114.35
  Top Layer w1.27: C10_3.2@215.033,130.625 L2_3.2@215.033,133.6
  Top Layer w2: L2_3.2@215.9,133.85 216.221,134.171 C8_3.2@221,134.171
  other v1: 214,111 216.5,111 218.9,111 221,111 211,111.7 221,112.9 211,113.7 211,115.8 221,116 214,117.7 216.5,117.7 218.9,117.7 221,117.7 211,117.9
  other v2: 216.5,114.3
NetC8_4_2: C8_4.2 C10_4.2 L2_4.2 U3_4.3 U3_4.6 | length 25.2
  Top Layer w1.016: C10_4.2@181.633,129.467 183,128.1 U3_4.3@183,124.9 U3_4.6@183,114.35
  Top Layer w1.27: C10_4.2@181.633,129.467 181.633,133.733 L2_4.2@181.7,133.8
  Top Layer w2: L2_4.2@182.4,133.85 182.65,134.1 C8_4.2@187.5,134.1
  other v1: 180.6,111 183.1,111 185.5,111 187.6,111 177.6,111.7 187.6,112.9 177.6,113.7 177.6,115.8 187.6,116 180.6,117.7 183.1,117.7 185.5,117.7 187.6,117.7 177.6,117.9
  other v2: 183.1,114.3
NetC8_5_2: C8_5.2 C10_5.2 L2_5.2 U3_5.3 U3_5.6 | length 26
  Top Layer w1.016: C10_5.2@281.933,129.9 281.933,128.867 283.3,127.5 U3_5.3@283.3,124.7 U3_5.6@283.3,114.15
  Top Layer w2: C10_5.2@281.933,129.9 281.933,132.483 L2_5.2@283.3,133.85 283.521,134.071 C8_5.2@288.4,134.071
  other v1: 280.9,110.8 283.4,110.8 285.8,110.8 287.9,110.8 277.9,111.5 287.9,112.6 277.9,113.5 277.9,115.7 287.9,115.7 287.9,117.4 277.9,117.5 280.9,117.5 283.4,117.5 285.8,117.5
  other v2: 283.4,114.1
NetC8_6_2: C8_6.2 C10_6.2 L2_6.2 U3_6.3 U3_6.6 | length 26.4
  Top Layer w1.016: C10_6.2@248.433,130.525 249.8,129.159 U3_6.3@249.8,124.8 U3_6.6@249.8,114.25
  Top Layer w2: C10_6.2@248.05,129.9 248.05,132.6 L2_6.2@249.4,133.95 249.621,134.171 C8_6.2@254.3,134.171
  other v1: 247.4,110.9 249.9,110.9 252.3,110.9 254.4,110.9 244.4,111.6 254.4,112.8 244.4,113.6 244.4,115.7 254.4,115.9 247.4,117.6 249.9,117.6 252.3,117.6 254.4,117.6 244.4,117.8
  other v2: 249.9,114.2
NetC9_1_2: C9_1.2 D2_1.1 D4_1.1 L2_1.1 R5_1.2 | length 26.8
  Top Layer w0.762: 165.1,145.85 R5_1.2@165.1,147.4
  Top Layer w1: D2_1.1@162.4,145.85 165.1,145.85
  Top Layer w1.27: C9_1.2@148.246,140.815 148.3,140.761 L2_1.1@148.3,138 ; C9_1.2@148.275,141.8 151.9,145.425 D4_1.1@151.9,145.85 151.9,147.7 162.4,147.7 D2_1.1@162.4,145.85
NetC9_2_2: C9_2.2 D2_2.1 D4_2.1 L2_2.1 R5_2.2 | length 26.4
  Top Layer w1.27: L2_2.1@115.1,137.85 114.275,138.675 114.275,141.6 114.275,142.075 D4_2.1@117.8,145.6 117.8,147.45 128.3,147.45 ; D2_2.1@128.3,145.6 128.3,147.4 130.603,147.4 R5_2.2@130.903,147.1
NetC9_3_2: C9_3.2 D2_3.1 D4_3.1 L2_3.1 R5_3.2 | length 26.7
  Top Layer w1.27: L2_3.1@215.9,137.95 214.775,139.075 C9_3.2@214.775,141.9 214.775,141.925 D4_3.1@218.7,145.85 218.7,147.7 229.2,147.7 ; D2_3.1@229.2,145.85 229.2,147.7 ; R5_3.2@231.703,147.6 229.3,147.6 229.2,147.7
NetC9_4_2: C9_4.2 D2_4.1 D4_4.1 L2_4.1 R5_4.2 | length 26.4
  Top Layer w1.27: C9_4.2@181.646,141.9 181.9,142.154 181.9,143.4 184.246,145.746 185.196,145.746 D4_4.1@185.3,145.85 185.3,147.7 195.8,147.7 ; C9_4.2@181.775,141.9 181.775,138.575 L2_4.1@182.4,137.95 ; D2_4.1@195.8,145.95 195.8,147.7 ; R5_4.2@197.9,147.7 195.8,147.7
NetC9_5_2: C9_5.2 D2_5.1 D4_5.1 L2_5.1 R5_5.2 | length 26.8
  Top Layer w1.27: C9_5.2@281.775,141.8 285.6,145.625 D4_5.1@285.6,145.65 285.6,147.5 296.1,147.5 ; D2_5.1@296.1,145.65 296.1,147.5 ; 298.8,147.5 296.1,147.5
  Top Layer w2: C9_5.2@281.775,141.8 281.775,139.475 L2_5.1@283.3,137.95
NetC9_6_2: C9_6.2 D2_6.1 D4_6.1 L2_6.1 R5_6.2 | length 25.4
  Top Layer w1.27: C9_6.2@248.075,141.8 252.025,145.75 D4_6.1@252.1,145.75 252.1,147.6 262.6,147.6 ; C9_6.2@248.2,140.961 248.5,140.661 L2_6.1@248.5,138.1 ; D2_6.1@262.6,145.75 262.6,147.6 ; 265.2,147.6 262.6,147.6
NetC67_1_2: C67_1.2 R44_1.2 U20_1.15 | length 9.9
  Top Layer w0.508: v1(137.2,168.5) 138.73,166.97 U20_1.15@138.73,164.5
  Bottom Layer w0.508: v1@137.3,168.5 v1(137.2,168.5) 138.4,169.7 R44_1.2@138.4,170.2 R44_1.2@138.5,170.3
  Bottom Layer w0.762: R44_1.2@138.5,170.3 C67_1.2@141.3,170.3
NetC67_2_2: C67_2.2 R44_2.2 U20_2.15 | length 9.9
  Top Layer w0.508: v1(103.1,168.25) 104.63,166.72 U20_2.15@104.63,164.25
  Bottom Layer w0.508: v1@103.2,168.25 v1(103.1,168.25) 104.3,169.45 R44_2.2@104.3,169.95 R44_2.2@104.4,170.05
  Bottom Layer w0.762: R44_2.2@104.4,170.05 C67_2.2@107.2,170.05
NetC67_3_2: C67_3.2 R44_3.2 U20_3.15 | length 9.9
  Top Layer w0.508: v1(204,168.5) 205.53,166.97 U20_3.15@205.53,164.5
  Bottom Layer w0.508: v1@204.1,168.5 v1(204,168.5) 205.2,169.7 R44_3.2@205.2,170.2 R44_3.2@205.3,170.3
  Bottom Layer w0.762: R44_3.2@205.3,170.3 C67_3.2@208.1,170.3
NetC67_4_2: C67_4.2 R44_4.2 U20_4.15 | length 9.9
  Top Layer w0.508: v1(170.6,168.5) 172.13,166.97 U20_4.15@172.13,164.5
  Bottom Layer w0.508: v1@170.7,168.5 v1(170.6,168.5) 171.8,169.7 R44_4.2@171.8,170.2 R44_4.2@171.9,170.3
  Bottom Layer w0.762: R44_4.2@171.9,170.3 C67_4.2@174.7,170.3
NetC67_5_2: C67_5.2 R44_5.2 U20_5.15 | length 9.9
  Top Layer w0.508: v1(270.9,168.3) 272.43,166.77 U20_5.15@272.43,164.3
  Bottom Layer w0.508: v1@271,168.3 v1(270.9,168.3) 272.1,169.5 R44_5.2@272.1,170 R44_5.2@272.2,170.1
  Bottom Layer w0.762: R44_5.2@272.2,170.1 C67_5.2@275,170.1
NetC67_6_2: C67_6.2 R44_6.2 U20_6.15 | length 9.9
  Top Layer w0.508: v1(237.4,168.4) 238.93,166.87 U20_6.15@238.93,164.4
  Bottom Layer w0.508: v1@237.5,168.4 v1(237.4,168.4) 238.6,169.6 R44_6.2@238.6,170.1 R44_6.2@238.7,170.2
  Bottom Layer w0.762: R44_6.2@238.7,170.2 C67_6.2@241.5,170.2
NetC72_1_2: C72_1.2 R47_1.1 U20_1.14 | length 21.2
  Top Layer w0.508: U20_1.14@140,164.5 140,168 137.4,170.6 137.4,182 C72_1.2@137.5,182.1 139.95,182.1 R47_1.1@140,182.15
NetC72_2_2: C72_2.2 R47_2.1 U20_2.14 | length 21.2
  Top Layer w0.508: U20_2.14@105.9,164.25 105.9,167.75 103.3,170.35 103.3,181.75 C72_2.2@103.4,181.85 105.85,181.85 R47_2.1@105.9,181.9
NetC72_3_2: C72_3.2 R47_3.1 U20_3.14 | length 21.2
  Top Layer w0.508: U20_3.14@206.8,164.5 206.8,168 204.2,170.6 204.2,182 204.3,182.1 206.75,182.1 R47_3.1@206.8,182.15
NetC72_4_2: C72_4.2 R47_4.1 U20_4.14 | length 21.2
  Top Layer w0.508: U20_4.14@173.4,164.5 173.4,168 170.8,170.6 170.8,182 C72_4.2@170.9,182.1 173.35,182.1 R47_4.1@173.4,182.15
NetC72_5_2: C72_5.2 R47_5.1 U20_5.14 | length 21.2
  Top Layer w0.508: U20_5.14@273.7,164.3 273.7,167.8 271.1,170.4 271.1,181.8 C72_5.2@271.2,181.9 273.65,181.9 R47_5.1@273.7,181.95
NetC72_6_2: C72_6.2 R47_6.1 U20_6.14 | length 21.2
  Top Layer w0.508: U20_6.14@240.2,164.4 240.2,167.9 237.6,170.5 237.6,181.9 C72_6.2@237.7,182 240.15,182 R47_6.1@240.2,182.05
NetC(Desat)1_1_2: C(Desat)1_1.2 D25_1.1 R43_1.1 U20_1.2 | length 29.4
  Top Layer w0.508: 137.2,132 137.2,133.2 138.6,134.6 138.6,153.5 138.73,153.63 U20_1.2@138.73,155.102
  Top Layer w1: 137.2,132 137.2,129.85 D25_1.1@137.55,129.5 137.55,128.15 138.3,127.4 R43_1.1@138.3,126.8
NetC(Desat)1_2_2: C(Desat)1_2.2 D25_2.1 R43_2.1 U20_2.2 | length 29.4
  Top Layer w0.508: 103.1,131.75 103.1,132.95 104.5,134.35 104.5,153.25 104.63,153.38 U20_2.2@104.63,154.852
  Top Layer w1: 103.1,131.75 103.1,129.6 D25_2.1@103.45,129.25 103.45,127.9 104.2,127.15 R43_2.1@104.2,126.55
NetC(Desat)1_3_2: C(Desat)1_3.2 D25_3.1 R43_3.1 U20_3.2 | length 29.4
  Top Layer w0.508: 204,132 204,133.2 205.4,134.6 205.4,153.5 205.53,153.63 U20_3.2@205.53,155.102
  Top Layer w1: 204,132 204,129.85 D25_3.1@204.35,129.5 204.35,128.15 205.1,127.4 R43_3.1@205.1,126.8
NetC(Desat)1_4_2: C(Desat)1_4.2 D25_4.1 R43_4.1 U20_4.2 | length 29.4
  Top Layer w0.508: 170.6,132 170.6,133.2 172,134.6 172,153.5 172.13,153.63 U20_4.2@172.13,155.102
  Top Layer w1: 170.6,132 170.6,129.85 D25_4.1@170.95,129.5 170.95,128.15 171.7,127.4 R43_4.1@171.7,126.8
NetC(Desat)1_5_2: C(Desat)1_5.2 D25_5.1 R43_5.1 U20_5.2 | length 29.4
  Top Layer w0.508: 270.9,131.8 270.9,133 272.3,134.4 272.3,153.3 272.43,153.43 U20_5.2@272.43,154.902
  Top Layer w1: 270.9,131.8 270.9,129.65 D25_5.1@271.25,129.3 271.25,127.95 272,127.2 R43_5.1@272,126.6
NetC(Desat)1_6_2: C(Desat)1_6.2 D25_6.1 R43_6.1 U20_6.2 | length 29.4
  Top Layer w0.508: 237.4,131.9 237.4,133.1 238.8,134.5 238.8,153.4 238.93,153.53 U20_6.2@238.93,155.002
  Top Layer w1: 237.4,131.9 237.4,129.75 D25_6.1@237.75,129.4 237.75,128.05 238.5,127.3 R43_6.1@238.5,126.7
NetD1_1_1: D1_1.1 D2_1.2 T1_1.12 | length 6.4
  Top Layer w1.27: D1_1.1@159.9,149.55 163.05,149.55 163.1,149.6 T1_1.12@163.1,152.8
NetD1_2_1: D1_2.1 D2_2.2 T1_2.12 | length 6.4
  Top Layer w1.27: D1_2.1@125.8,149.3 128.95,149.3 129,149.35 T1_2.12@129,152.55
NetD1_3_1: D1_3.1 D2_3.2 T1_3.12 | length 6.4
  Top Layer w1.27: D1_3.1@226.7,149.55 229.85,149.55 229.9,149.6 T1_3.12@229.9,152.8
NetD1_4_1: D1_4.1 D2_4.2 T1_4.12 | length 6.4
  Top Layer w1.27: D1_4.1@193.3,149.55 196.45,149.55 196.5,149.6 T1_4.12@196.5,152.8
NetD1_5_1: D1_5.1 D2_5.2 T1_5.12 | length 6.4
  Top Layer w1.27: D1_5.1@293.6,149.35 296.75,149.35 296.8,149.4 T1_5.12@296.8,152.6
NetD1_6_1: D1_6.1 D2_6.2 T1_6.12 | length 6.4
  Top Layer w1.27: D1_6.1@260.1,149.45 263.25,149.45 263.3,149.5 T1_6.12@263.3,152.7
NetD3_1_1: D3_1.1 D4_1.2 T1_1.7 | length 7
  Top Layer w1.27: T1_1.7@150.6,152.8 150.6,149.6 150.65,149.55 D3_1.1@154.4,149.55
NetD3_2_1: D3_2.1 D4_2.2 T1_2.7 | length 7
  Top Layer w1.27: T1_2.7@116.5,152.55 116.5,149.35 116.55,149.3 D3_2.1@120.3,149.3
NetD3_3_1: D3_3.1 D4_3.2 T1_3.7 | length 7
  Top Layer w1.27: T1_3.7@217.4,152.8 217.4,149.6 217.45,149.55 D3_3.1@221.2,149.55
NetD3_4_1: D3_4.1 D4_4.2 T1_4.7 | length 7
  Top Layer w1.27: T1_4.7@184,152.8 184,149.6 184.05,149.55 D3_4.1@187.8,149.55
NetD3_5_1: D3_5.1 D4_5.2 T1_5.7 | length 7
  Top Layer w1.27: T1_5.7@284.3,152.6 284.3,149.4 284.35,149.35 D3_5.1@288.1,149.35
NetD3_6_1: D3_6.1 D4_6.2 T1_6.7 | length 7
  Top Layer w1.27: T1_6.7@250.8,152.7 250.8,149.5 250.85,149.45 D3_6.1@254.6,149.45
NetD27_1_2: D27_1.2 RG1_1.2
NetD27_2_2: D27_2.2 RG1_2.2
NetD27_3_2: D27_3.2 RG1_3.2
NetD27_4_2: D27_4.2 RG1_4.2
NetD27_5_2: D27_5.2 RG1_5.2
NetD27_6_2: D27_6.2 RG1_6.2
NetD30_1_1: D30_1.1 R40_1.1 | length 16.7
  Top Layer w1.27: v1(152.2,107.5) 153.05,107.5 R40_1.1@153.15,107.4 ; D30_1.1@153.3,92.215 v1(153.3,95.7)
  Bottom Layer w1.27: v1(152.2,107.5) 153.3,106.4 v1(153.3,95.7)
NetD30_1_2: D30_1.2 D33_1.2 R41_1.1
NetD30_2_1: D30_2.1 R40_2.1 | length 16.7
  Top Layer w1.27: v1(118.1,107.25) 118.95,107.25 R40_2.1@119.05,107.15 ; D30_2.1@119.2,91.965 v1(119.2,95.45)
  Bottom Layer w1.27: v1(118.1,107.25) 119.2,106.15 v1(119.2,95.45)
NetD30_2_2: D30_2.2 D33_2.2 R41_2.1
NetD30_3_1: D30_3.1 R40_3.1 | length 16.7
  Top Layer w1.27: v1(219,107.5) 219.85,107.5 R40_3.1@219.95,107.4 ; D30_3.1@220.1,92.215 v1(220.1,95.7)
  Bottom Layer w1.27: v1(219,107.5) 220.1,106.4 v1(220.1,95.7)
NetD30_3_2: D30_3.2 D33_3.2 R41_3.1
NetD30_4_1: D30_4.1 R40_4.1 | length 16.7
  Top Layer w1.27: v1(185.6,107.5) 186.45,107.5 R40_4.1@186.55,107.4 ; D30_4.1@186.7,92.215 v1(186.7,95.7)
  Bottom Layer w1.27: v1(185.6,107.5) 186.7,106.4 v1(186.7,95.7)
NetD30_4_2: D30_4.2 D33_4.2 R41_4.1
NetD30_5_1: D30_5.1 R40_5.1 | length 16.7
  Top Layer w1.27: v1(285.9,107.3) 286.75,107.3 R40_5.1@286.85,107.2 ; D30_5.1@287,92.015 v1(287,95.5)
  Bottom Layer w1.27: v1(285.9,107.3) 287,106.2 v1(287,95.5)
NetD30_5_2: D30_5.2 D33_5.2 R41_5.1
NetD30_6_1: D30_6.1 R40_6.1 | length 16.7
  Top Layer w1.27: v1(252.4,107.4) 253.25,107.4 R40_6.1@253.35,107.3 ; D30_6.1@253.5,92.115 v1(253.5,95.6)
  Bottom Layer w1.27: v1(252.4,107.4) 253.5,106.3 v1(253.5,95.6)
NetD30_6_2: D30_6.2 D33_6.2 R41_6.1
NetD31_1_2: D31_1.2 R41_1.2 | length 6.7
  Top Layer w1.27: R41_1.2@157.1,91.75 D31_1.2@163.8,91.75
NetD31_2_1: D31_2.1 D32_2.2 D126.1 | length 65.9
  Top Layer w0.508: D31_2.1@129.99,86.85 D31_2.1@130.4,87.26
  Top Layer w1: v1(104.4,109.45) D126.1@104.4,116.156 ; D31_2.1@129.99,86.85 v1(132.6,86.85)
  Top Layer w1.27: D32_2.2@129.7,84.26 130.4,84.96 D31_2.1@130.4,87.26
  Bottom Layer w0.508: v1(132.6,86.85) v1@132.7,86.85
  Bottom Layer w1: v1(104.4,109.45) 105.1,108.75 133.9,108.75 134.4,108.25 134.4,88.55 v1@132.7,86.85
NetD31_2_2: D31_2.2 R41_2.2 | length 6.7
  Top Layer w1.27: R41_2.2@123,91.5 D31_2.2@129.7,91.5
NetD31_3_1: D31_3.1 D32_3.2 D127.1 | length 65.3
  Top Layer w0.508: D31_3.1@230.6,87.39 D31_3.1@230.89,87.1
  Top Layer w1: v1(205.3,109.7) D127.1@205.3,116.406 ; D31_3.1@230.89,87.1 v1(233.5,87.1)
  Top Layer w1.27: D32_3.2@230.6,84.51 D31_3.1@230.6,87.39
  Bottom Layer w0.508: v1(233.5,87.1) v1@233.6,87.1
  Bottom Layer w1: v1(205.3,109.7) 206,109 234.8,109 235.3,108.5 235.3,88.8 v1@233.6,87.1
NetD31_3_2: D31_3.2 R41_3.2 | length 6.7
  Top Layer w1.27: R41_3.2@223.9,91.75 D31_3.2@230.6,91.75
NetD31_4_1: D31_4.1 D32_4.2 D128.1 | length 62.3
  Top Layer w1: v1(171.9,109.7) D128.1@171.9,116.406
  Top Layer w1.27: D32_4.2@198.8,84.41 198.9,84.51 D31_4.1@198.9,87.29
  Bottom Layer w0.508: v1(200.1,87.1) v1@200.2,87.1
  Bottom Layer w1: v1(171.9,109.7) 172.6,109 201.4,109 201.9,108.5 201.9,88.8 v1@200.2,87.1
NetD31_4_2: D31_4.2 R41_4.2 | length 8.4
  Top Layer w1.27: R41_4.2@190.5,91.75 D31_4.2@198.9,91.75
NetD31_5_1: D31_5.1 D32_5.2 D129.1 | length 64.6
  Top Layer w0.508: 297.5,87.19 297.79,86.9
  Top Layer w1: v1(272.2,109.5) D129.1@272.2,116.206 ; 297.79,86.9 v1(300.4,86.9)
  Top Layer w1.27: D32_5.2@297.5,85 297.5,87.19
  Bottom Layer w0.508: v1(300.4,86.9) v1@300.5,86.9
  Bottom Layer w1: v1(272.2,109.5) 272.9,108.8 301.7,108.8 302.2,108.3 302.2,88.6 v1@300.5,86.9
NetD31_5_2: D31_5.2 R41_5.2 | length 6.7
  Top Layer w1.27: R41_5.2@290.8,91.65 D31_5.2@297.5,91.65
NetD31_6_1: D31_6.1 D32_6.2 D130.1 | length 62.3
  Top Layer w1: v1(238.7,109.6) D130.1@238.7,116.306
  Top Layer w1.27: D32_6.2@265.9,84.41 D31_6.1@265.9,87.19 ; D31_6.1@265.91,87.1 D31_6.1@266,87.19
  Bottom Layer w0.508: v1(266.9,87) v1@267,87
  Bottom Layer w1: v1(238.7,109.6) 239.4,108.9 268.2,108.9 268.7,108.4 268.7,88.7 v1@267,87
NetD31_6_2: D31_6.2 R41_6.2 | length 8.9
  Top Layer w1.27: R41_6.2@257.3,91.8 D31_6.2@266.2,91.8
NetD32_1_1: D32_1.1 T1C.1 | length 6.6
  Top Layer w0.254: 160.7,74.3 T1C.1@162.4,74.3
  Top Layer w1.27: T1C.1@163.6,75.2 163.8,75.4 D32_1.1@163.8,79.99
NetD32_3_1: D32_3.1 T3C.1 | length 5.3
  Top Layer w0.508: T3C.1@230.6,76.6 T3C.1@231.2,76
  Top Layer w2: T3C.1@230.6,76.6 D32_3.1@230.6,80.09 ; T3C.1@231.2,76 T3C.1@231.894,76.694
NetD32_5_1: D32_5.1 T5C.1 | length 10.3
  Top Layer w1.27: D32_5.1@296.38,81.28 D32_5.1@297.5,81.28
  Top Layer w2: T5C.1@289.9,74.8 D32_5.1@296.38,81.28
NetD33_1_1: D33_1.1 R42_1.2 | length 3.3
  Top Layer w1.27: R42_1.2@151.6,79.8 154.885,79.8 D33_1.1@154.9,79.785
NetD33_2_1: D33_2.1 R42_2.2 | length 3.3
  Top Layer w1.27: R42_2.2@117.5,79.55 120.785,79.55 D33_2.1@120.8,79.535
NetD33_3_1: D33_3.1 R42_3.2 | length 3.3
  Top Layer w1.27: R42_3.2@218.4,79.8 221.685,79.8 D33_3.1@221.7,79.785
NetD33_4_1: D33_4.1 R42_4.2 | length 3.3
  Top Layer w1.27: R42_4.2@185,79.8 188.285,79.8 D33_4.1@188.3,79.785
NetD33_5_1: D33_5.1 R42_5.2 | length 3.3
  Top Layer w1.27: R42_5.2@285.3,79.6 288.585,79.6 D33_5.1@288.6,79.585
NetD33_6_1: D33_6.1 R42_6.2 | length 3.3
  Top Layer w1.27: R42_6.2@251.8,79.7 255.085,79.7 D33_6.1@255.1,79.685
NetD125_2: D125.2 R43_1.2 | length 4.7
  Top Layer w0.508: D125.2@138.3,120.594 D125.2@138.5,120.394
  Top Layer w1: D125.2@138.3,120.594 R43_1.2@138.3,125
NetD126_2: D126.2 R43_2.2 | length 4.7
  Top Layer w0.508: D126.2@104.2,120.344 D126.2@104.4,120.144
  Top Layer w1: D126.2@104.2,120.344 R43_2.2@104.2,124.75
NetD127_2: D127.2 R43_3.2 | length 4.7
  Top Layer w0.508: D127.2@205.1,120.594 D127.2@205.3,120.394
  Top Layer w1: D127.2@205.1,120.594 R43_3.2@205.1,125
NetD128_2: D128.2 R43_4.2 | length 4.7
  Top Layer w0.508: D128.2@171.7,120.594 D128.2@171.9,120.394
  Top Layer w1: D128.2@171.7,120.594 R43_4.2@171.7,125
NetD129_2: D129.2 R43_5.2 | length 4.7
  Top Layer w0.508: D129.2@272,120.394 D129.2@272.2,120.194
  Top Layer w1: D129.2@272,120.394 R43_5.2@272,124.8
NetD130_2: D130.2 R43_6.2 | length 4.7
  Top Layer w0.508: D130.2@238.5,120.494 D130.2@238.7,120.294
  Top Layer w1: D130.2@238.5,120.494 R43_6.2@238.5,124.9